# Altium PCB CR-10 Motherboard.PcbDoc (part 3 of 14)
Units mil, origin at the board's own origin, x right, y up, seen from the top; angles counter-clockwise.
Board outline 3970.48 x 2769.68 mil, 2 copper layers (TopLayer, BottomLayer); 147 components, 128 nets, 667 pads, 614 vias.
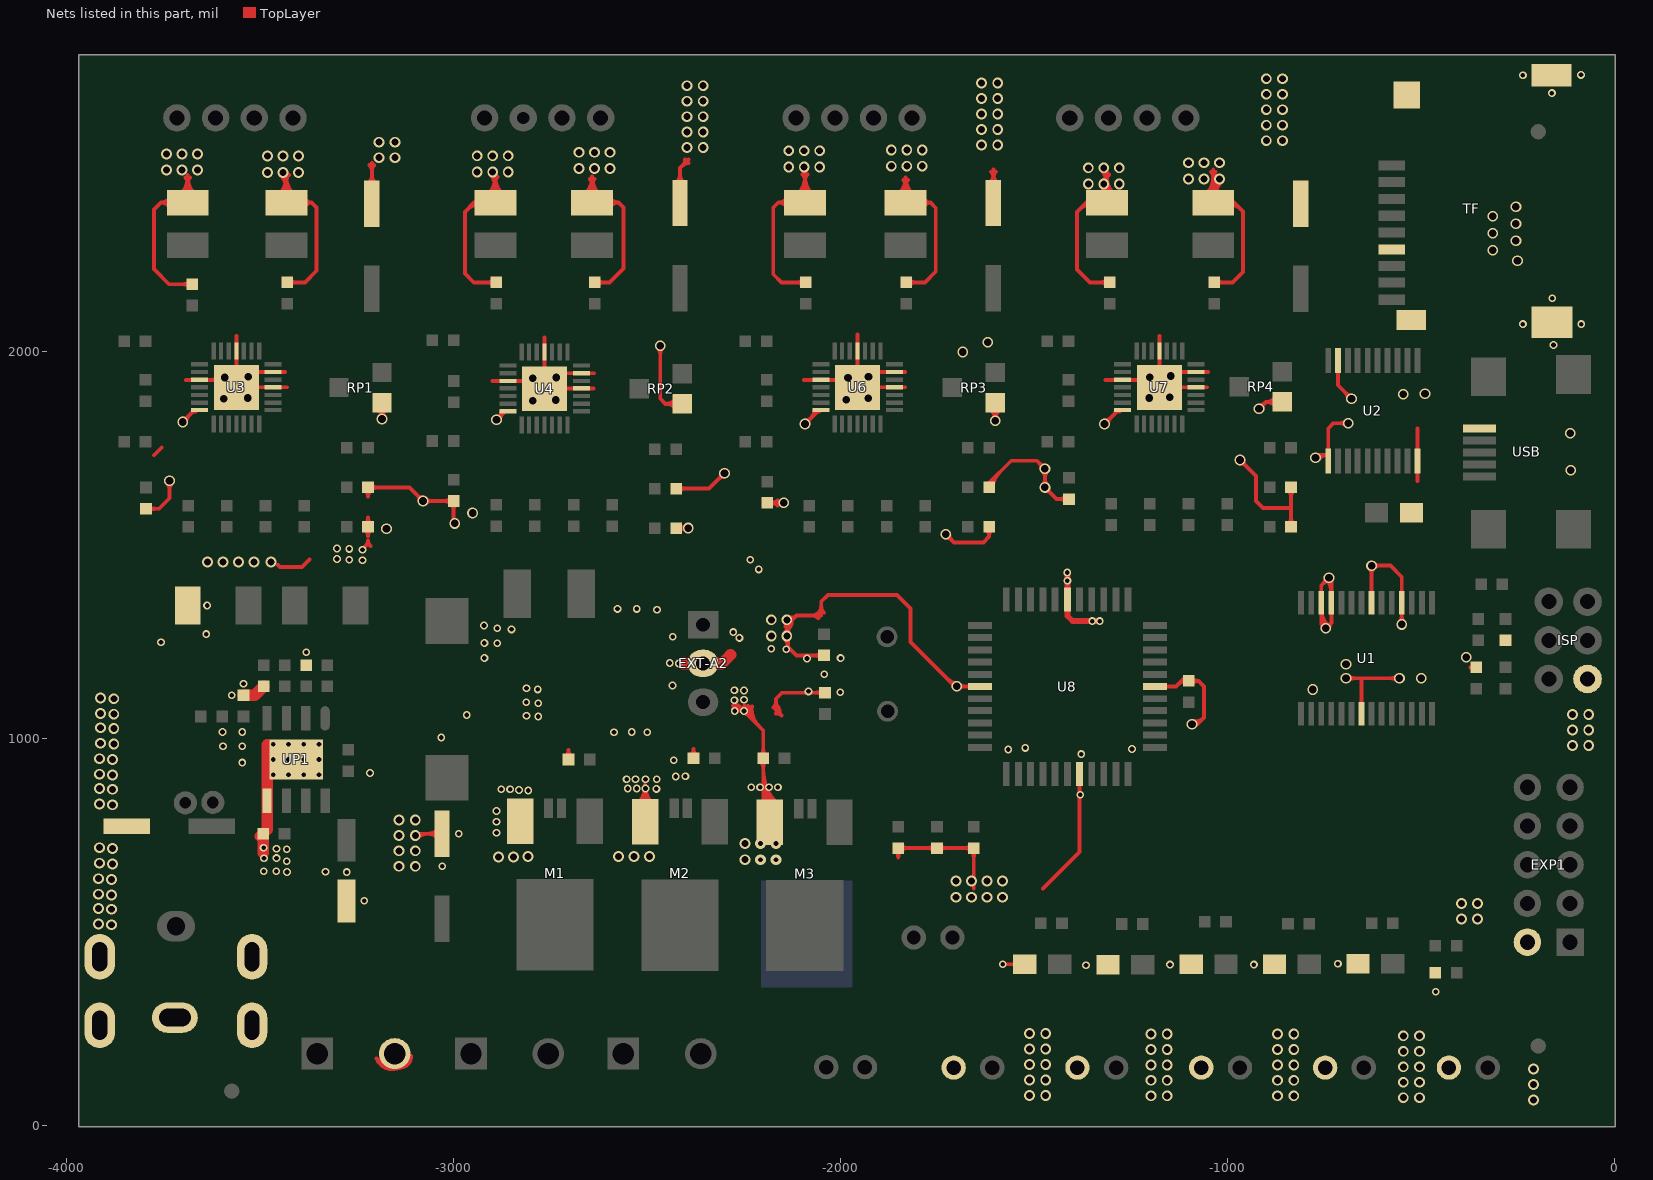
[diagram p3: the nets of this part, all layers, seen from the top]

## Via types
v1: diameter 28, hole 18, TopLayer to BottomLayer, tented both sides, 246 vias
v2: diameter 27.56, hole 19.68, TopLayer to BottomLayer, tented both sides, 196 vias
v3: diameter 20, hole 12, TopLayer to BottomLayer, tented both sides, 124 vias
v4: diameter 27.56, hole 11.81, TopLayer to BottomLayer, tented bottom, 16 vias
v5: diameter 27.56, hole 19.68, TopLayer to BottomLayer, 16 vias
v6: diameter 20, hole 12, TopLayer to BottomLayer, 12 vias
v7: diameter 28, hole 11.81, TopLayer to BottomLayer, tented both sides, 4 vias

## Nets (pads, with @x,y where several pads share a name; then routed paths per layer and width w, separated by ;. In a path a pad name is that pad's centre, name@x,y a point inside that pad or via, vN(x,y) a via of type N, cw(c..) or ccw(c..) an arc to the next point about the centre after c; other vN are vias at no path point) (continued)
GND: (continued)
  TopLayer w10: C34.2@-3794.45,1594.8 -3760.57,1594.8 -3733.54,1621.84 v2(-3733.54,1666.84) ; -3773.85,1732.88 -3753.54,1753.19 ; v2(-3699.54,1818.84) -3672.54,1845.84 -3666.54,1845.84 U3.7@-3666.54,1846.84 ; -3690.57,1927.88 -3618.62,1927.88 -3619.58,1928.84 ; -3686.54,2456.84 S1.2@-3686.54,2385.84 -3755.54,2385.84 ; C11.1@-3674.54,2174.84 -3734.54,2174.84 -3773.54,2213.84 -3773.54,2367.84 -3755.54,2385.84 ; U3.0@-3603.54,1928.84 -3619.58,1928.84 ; U3.0@-3560.62,1946.93 -3560.62,2041.76 ; U3.0@-3524.54,1947.84 U3.0@-3504.38,1947.84 ; U3.0@-3520.47,1908.88 -3430.5,1908.88 ; U3.0@-3502.62,1947.88 -3435.5,1947.88 ; -3453,1449 -3448.39,1444.39 -3391.61,1444.39 -3372,1464 ; v1@-3446.9,2457.48 cw(c-3483.99,2420.39) -3431.54,2420.39 ; v1@-3439.83,2464.55 cw(c-3459.85,2444.53) -3431.54,2444.53 ; v1@-3431.54,2463.84 S2.2@-3431.54,2385.84 -3366.54,2385.84 ; C12.2@-3429.54,2179.84 -3383.54,2179.84 -3353.54,2209.84 -3353.54,2372.84 -3366.54,2385.84 ; C13.2@-3220.62,1649.88 -3113.57,1649.88 v2(-3078.54,1614.84) C36.2@-2999.54,1614.84 -2999.54,1557.84 -2996.54,1554.84 v2(-2996.54,1556.84) ; C1.2@-3210.62,2382.88 -3210.62,2488.76 ; RP1.2@-3184.62,1868.88 v2(-3184.62,1826.76) ; v1@-3099.54,754.84 C28.2@-3029.54,754.84 ; v1@-3092.17,744.48 cw(c-3067.15,719.46) -3067.15,754.84 ; v1@-2904.9,2458.48 cw(c-2937.16,2426.22) -2891.54,2426.22 ; -2899.54,1924.84 U4.0@-2799.54,1924.84 ; v1@-2897.83,2465.55 cw(c-2913.02,2450.36) -2891.54,2450.36 ; v1@-2891.54,2458.84 S3.2@-2891.54,2385.84 -2946.54,2385.84 ; C15.1@-2889.54,2179.84 -2947.54,2179.84 -2970.54,2202.84 -2970.54,2361.84 -2946.54,2385.84 ; v2(-2888.54,1824.84) U4.7@-2869.54,1843.84 ; -2764.54,2036.84 -2764.54,1941.84 U4.0@-2763.54,1940.84 ; U4.0@-2726.54,1905.84 -2637.54,1905.84 ; U4.0@-2721.54,1944.84 U4.0@-2707.94,1944.84 ; -2706.54,1944.84 -2636.54,1944.84 ; C16.2@-2634.54,2179.84 -2596.54,2179.84 -2560.54,2215.84 -2560.54,2372.84 -2573.54,2385.84 ; v2(-2465.54,2015.84) -2465.54,1879.84 -2451.54,1865.84 ; R17.2@-2424.54,1544.84 v2(-2393.54,1544.84) ; C17.2@-2424.54,1646.84 -2339.54,1646.84 v2(-2299.54,1686.84) ; C2.2@-2414.54,2384.84 -2414.54,2474.84 -2392.54,2496.84 ; RP2.2@-2408.54,1865.84 -2451.54,1865.84 ; -2278.04,1085.71 cw(c-2271.04,1073.69) -2261.22,1083.52 ; v3@-2277.54,1075.84 cw(c-2277.54,1017.9) -2236.56,1058.87 ; -2277.54,1085.84 cw(c-2277.54,1052.04) v3@-2253.64,1075.94 ; v3@-2273.01,1077.06 cw(c-2264.29,1062.09) v3@-2252.04,1074.34 ; -2259.54,1081.84 -2199.54,1021.84 -2199.54,801.84 M3.3@-2182.54,784.84 ; -2248.43,1086.34 ccw(c-2220.81,1082.55) -2240.52,1062.83 ; -2238.53,1084.98 ccw(c-2195.75,1079.12) -2226.28,1048.59 ; -2228.62,1083.62 ccw(c-2170.7,1075.68) -2212.04,1034.34 ; C38.2@-2189.54,1609.84 v2@-2156.54,1609.84 ; -2166.54,1074.84 -2166.54,1103.84 -2150.94,1119.44 C51.2@-2039.8,1119.44 ; v1@-2144.9,1272.21 ccw(c-2167.51,1294.81) v1@-2135.54,1294.81 ; v1@-2144.9,1301.48 cw(c-2167.51,1278.87) v1@-2135.54,1278.87 ; v1@-2144.77,1259.35 cw(c-2165.57,1237.68) v3@-2135.54,1237.68 ; v1@-2139.01,1306.96 ccw(c-2132.62,1318.88) -2123.06,1309.32 ; -2135.54,1251.36 cw(c-2124.05,1251.36) v1@-2132.17,1259.48 ; -2135.54,1280.33 ccw(c-2124.05,1280.33) v1@-2132.17,1272.21 ; -2135.54,1293.36 cw(c-2124.05,1293.36) v1@-2132.17,1301.48 ; v1@-2134.28,1315.78 ccw(c-2125.98,1331.28) -2113.54,1318.84 ; v1@-2099.9,2471.48 cw(c-2120.09,2451.29) -2091.54,2451.29 ; -2094.5,1927.88 -2013.62,1927.88 ; v2(-2091.54,1813.84) -2060.54,1844.84 -2060.54,1845.84 -2054.66,1845.84 U6.7@-2052.12,1848.38 ; -2091.54,2460.94 cw(c-2076.64,2460.94) v1@-2087.17,2471.48 ; v1@-2091.54,2464.84 S5.2@-2091.54,2385.84 -2160.54,2385.84 ; C19.1@-2089.54,2179.84 -2152.54,2179.84 -2173.54,2200.84 -2173.54,2372.84 -2160.54,2385.84 ; C50.2@-2042.46,1215.91 -2113.61,1215.91 -2135.54,1237.84 -2135.54,1296.84 -2113.54,1318.84 ; -2013.66,1927.88 -2013.62,1927.84 U6.0@-1999.54,1927.84 ; U6.0@-1955.62,1964.15 -1955.54,1964.07 U6.0@-1955.54,1951.84 ; U6.0@-1955.62,1965.88 -1955.62,2044.93 ; U6.0@-1897.62,1908.88 -1832.57,1908.88 ; U6.0@-1897.62,1947.88 -1833.57,1947.88 ; C43.2@-1850.54,717.84 C42.2@-1655.54,717.84 -1655.54,613.84 ; C20.2@-1829.54,2179.84 -1781.54,2179.84 -1753.54,2207.84 -1753.54,2371.84 -1767.54,2385.84 ; v2(-1727.54,1528.84) -1706.54,1507.84 -1630.54,1507.84 -1615.62,1522.76 R20.2@-1615.62,1547.88 ; U8.6@-1639.54,1135.84 -1703.54,1135.84 -1818.54,1250.84 -1818.54,1336.84 -1853.54,1371.84 -2032.54,1371.84 -2049.54,1354.84 -2049.54,1318.84 -2113.54,1318.84 ; C3.2@-1604.54,2384.84 -1604.54,2471.84 ; RP3.2@-1599.62,1868.88 v2(-1599.62,1821.93) ; v3(-1580.54,417.84) C5.2@-1523.54,417.84 ; -1476.54,613.84 -1382.54,707.84 U8.18@-1382.54,908.84 ; C40.2@-1409.45,1619.8 -1441.5,1619.8 v2(-1471.54,1649.84) v2(-1471.54,1697.84) -1492.54,1718.84 -1558.54,1718.84 -1615.62,1661.76 C21.2@-1615.62,1649.88 ; v1@-1325.9,2427.48 cw(c-1360.58,2392.8) S7.2@-1311.54,2392.8 ; v1@-1325.9,2469.48 cw(c-1360.58,2434.8) v1@-1311.54,2434.8 ; v1@-1324.37,2441.43 ccw(c-1339.3,2464.84) -1311.54,2464.84 S7.2@-1311.54,2385.84 -1364.54,2385.84 -1388.54,2361.84 -1388.54,2212.84 -1355.54,2179.84 C23.1@-1304.54,2179.84 ; v1@-1319,2433 ccw(c-1327.67,2446.61) -1311.54,2446.61 ; v1@-1318.83,2434.55 cw(c-1336.43,2416.94) S7.2@-1311.54,2416.94 ; v1@-1318.83,2476.55 cw(c-1336.43,2458.94) -1311.54,2458.94 ; v2(-1317.54,1813.84) -1285.54,1845.84 U7.7@-1278.54,1845.84 ; -1315.57,1927.88 -1228.49,1927.88 U7.0@-1228.45,1927.84 ; U8.28@-1187.54,1135.84 -1132.54,1135.84 -1109.54,1158.84 C45.2@-1099.54,1158.84 ; -1175.62,2041.93 -1175.62,1949.25 U7.0@-1174.54,1948.16 ; U7.0@-1139.54,1947.84 U7.0@-1119.55,1947.84 ; U7.0@-1136.54,1908.84 -1136.2,1908.84 -1136.16,1908.88 -1052.57,1908.88 ; U7.0@-1117.66,1947.84 -1117.62,1947.88 -1049.5,1947.88 ; C45.2@-1092.46,1142.77 cw(c-1075.39,1125.7) -1075.39,1149.84 cw(c-1075.39,1173.98) C45.2@-1092.46,1156.91 ; v2@-1091.8,1036.65 ccw(c-1087.45,1056.06) -1073.38,1041.99 ; v2(-1091.54,1037.84) -1077.54,1037.84 ; v2@-1089.61,1046.41 ccw(c-1082.74,1077.04) -1060.54,1054.84 ; v2@-1083.63,1034.02 cw(c-1077.54,1031.07) -1077.54,1037.84 ; v2@-1083.63,1041.67 ccw(c-1077.54,1044.61) -1077.54,1037.84 ; S8.2@-1036.54,2386.49 cw(c-960.18,2386.49) v1@-1014.17,2440.48 ; S8.2@-1036.54,2410.63 cw(c-984.32,2410.63) v1@-1021.24,2447.55 ; -1036.54,2434.77 cw(c-1008.46,2434.77) v1@-1028.31,2454.62 ; -1036.54,2471.84 S8.2@-1036.54,2385.84 -982.54,2385.84 -959.54,2362.84 -959.54,2206.84 -986.54,2179.84 C24.2@-1034.54,2179.84 ; S8.2@-1016.25,2387.71 cw(c-1002.67,2352.16) -975.76,2379.07 ; S8.2@-1012.68,2378.37 cw(c-996.64,2336.37) -964.85,2368.16 ; v2(-967.54,1720.84) -926.54,1679.84 -926.54,1614.84 -908.54,1596.84 -835.62,1596.84 ; v2(-918.54,1852.84) -900.54,1870.84 ; RP4.2@-858.54,1870.84 -900.54,1870.84 ; R23.2@-835.62,1547.88 C25.2@-835.62,1649.88 ; v2@-773.49,1727.61 cw(c-760.45,1717.09) -760.45,1733.84 ; v2(-772.54,1726.84) -765.54,1733.84 U2.1@-739.54,1733.84 ; v2@-765.7,1721.33 cw(c-739.54,1700.23) U2.1@-739.54,1733.84 ; -757.54,1311.87 ccw(c-719.51,1311.87) v2@-746.4,1284.98 ; U1.26@-757.54,1336.01 ccw(c-695.37,1336.01) v2@-739.33,1292.05 ; v2@-754.19,1287.32 ccw(c-766.03,1289.35) -757.53,1297.84 ; v2@-747.02,1294.5 cw(c-749.04,1306.33) -757.53,1297.84 ; v2@-746.31,1416.84 cw(c-767.51,1416.84) -752.52,1401.85 cw(c-737.54,1386.87) v2@-737.54,1408.06 ; v2(-745.54,1285.84) -757.54,1297.84 ; v2@-744.34,1294.54 ccw(c-742.27,1309.57) -731.54,1298.84 ; v2@-743.74,1410.63 cw(c-773.22,1381.16) U1.25@-731.54,1381.16 ; v2@-742.51,1294.08 ccw(c-739.9,1301.21) -734.54,1295.84 ; v2@-736.95,1287.68 cw(c-728.23,1289.54) -734.54,1295.84 ; v2@-736.76,1285.97 cw(c-718.93,1286.23) -731.54,1298.84 ; U2.19@-714.54,1977.6 -714.54,1913.84 v2(-679.54,1878.84) ; v2@-693.74,1809.63 ccw(c-708.73,1794.65) -708.73,1815.84 ccw(c-708.73,1837.04) v2@-693.74,1822.05 ; v2(-693.54,1156.84) v2(-555.54,1156.84) ; v2@-688.31,1878.84 ccw(c-709.51,1878.84) -694.52,1893.83 ccw(c-679.54,1908.82) v2@-679.54,1887.62 ; v2(-687.54,1815.84) -725.54,1815.84 -739.54,1801.84 U2.1@-739.54,1733.84 ; U1.7@-653.54,1064.84 -653.54,1156.84 ; v2@-633.74,1441.63 cw(c-648.73,1426.65) -627.54,1426.65 cw(c-606.34,1426.65) -621.33,1441.63 cw(c-606.34,1426.65) -606.34,1447.84 cw(c-606.34,1469.04) v2@-621.33,1454.05 ; U1.21@-627.54,1351.84 v2(-627.54,1447.84) -578.54,1447.84 -549.54,1418.84 v2(-549.54,1295.84) ; v2@-555.74,1302.05 ccw(c-570.73,1317.04) -549.54,1317.04 ccw(c-528.34,1317.04) v2@-543.33,1302.05 ; -508.54,1665.84 -508.54,1801.84 ; 1K.2@-371.54,1184.84 1K.2@-356.54,1184.84 ; C34.2@-3787.38,1587.73 cw(c-3770.31,1570.66) -3770.31,1594.8 ; C34.2@-3787.38,1587.73 cw(c-3770.31,1570.66) -3770.31,1594.8 ; C34.2@-3787.38,1587.73 cw(c-3770.31,1570.66) -3770.31,1594.8 ; C34.2@-3787.38,1587.73 cw(c-3770.31,1570.66) -3770.31,1594.8 ; C34.2@-3787.38,1587.73 cw(c-3770.31,1570.66) -3770.31,1594.8 ; C34.2@-3787.38,1587.73 cw(c-3770.31,1570.66) -3770.31,1594.8 ; C34.2@-3787.38,1587.73 cw(c-3770.31,1570.66) -3770.31,1594.8 ; C34.2@-3787.38,1587.73 cw(c-3770.31,1570.66) -3770.31,1594.8 ; C34.2@-3787.38,1587.73 cw(c-3770.31,1570.66) -3770.31,1594.8 ; C34.2@-3787.38,1601.87 ccw(c-3770.31,1618.95) -3770.31,1594.8 ; C34.2@-3787.38,1601.87 ccw(c-3770.31,1618.95) -3770.31,1594.8 ; C34.2@-3787.38,1601.87 ccw(c-3770.31,1618.95) -3770.31,1594.8 ; C34.2@-3787.38,1601.87 ccw(c-3770.31,1618.95) -3770.31,1594.8 ; C34.2@-3787.38,1601.87 ccw(c-3770.31,1618.95) -3770.31,1594.8 ; C34.2@-3787.38,1601.87 ccw(c-3770.31,1618.95) -3770.31,1594.8 ; C34.2@-3787.38,1601.87 ccw(c-3770.31,1618.95) -3770.31,1594.8 ; C34.2@-3787.38,1601.87 ccw(c-3770.31,1618.95) -3770.31,1594.8 ; C34.2@-3787.38,1601.87 ccw(c-3770.31,1618.95) -3770.31,1594.8 ; -3755.53,2385.84 cw(c-3755.53,2358.7) S1.2@-3731.91,2372.06 ; -3755.53,2385.84 ccw(c-3755.53,2412.98) S1.2@-3731.91,2399.62 ; -3755.53,2385.84 cw(c-3755.53,2358.7) S1.2@-3731.91,2372.06 ; -3755.53,2385.84 ccw(c-3755.53,2412.98) S1.2@-3731.91,2399.62 ; -3755.53,2385.84 cw(c-3755.53,2358.7) S1.2@-3731.91,2372.06 ; -3755.53,2385.84 ccw(c-3755.53,2412.98) S1.2@-3731.91,2399.62 ; -3755.53,2385.84 cw(c-3755.53,2358.7) S1.2@-3731.91,2372.06 ; -3755.53,2385.84 ccw(c-3755.53,2412.98) S1.2@-3731.91,2399.62 ; -3755.53,2385.84 cw(c-3755.53,2358.7) S1.2@-3731.91,2372.06 ; -3755.53,2385.84 ccw(c-3755.53,2412.98) S1.2@-3731.91,2399.62 ; -3755.53,2385.84 ccw(c-3755.53,2412.98) S1.2@-3731.91,2399.62 ; -3755.53,2385.84 cw(c-3755.53,2358.7) S1.2@-3731.91,2372.06 ; -3755.53,2385.84 ccw(c-3755.53,2412.98) S1.2@-3731.91,2399.62 ; -3755.53,2385.84 cw(c-3755.53,2358.7) S1.2@-3731.91,2372.06 ; -3755.53,2385.84 ccw(c-3755.53,2412.98) S1.2@-3731.91,2399.62 ; -3755.53,2385.84 cw(c-3755.53,2358.7) S1.2@-3731.91,2372.06 ; -3755.53,2385.84 ccw(c-3755.53,2412.98) S1.2@-3731.91,2399.62 ; -3755.53,2385.84 cw(c-3755.53,2358.7) S1.2@-3731.91,2372.06 ; v2@-3739.74,1660.63 cw(c-3754.73,1645.65) -3733.54,1645.65 ; v2@-3739.74,1660.63 cw(c-3754.73,1645.65) -3733.54,1645.65 ; v2@-3739.74,1660.63 cw(c-3754.73,1645.65) -3733.54,1645.65 ; v2@-3739.74,1660.63 cw(c-3754.73,1645.65) -3733.54,1645.65 ; v2@-3739.74,1660.63 cw(c-3754.73,1645.65) -3733.54,1645.65 ; v2@-3739.74,1660.63 cw(c-3754.73,1645.65) -3733.54,1645.65 ; v2@-3739.74,1660.63 cw(c-3754.73,1645.65) -3733.54,1645.65 ; v2@-3739.74,1660.63 cw(c-3754.73,1645.65) -3733.54,1645.65 ; v2@-3739.74,1660.63 cw(c-3754.73,1645.65) -3733.54,1645.65 ; -3733.54,1645.65 cw(c-3712.34,1645.65) v2@-3727.33,1660.63 ; -3733.54,1645.65 cw(c-3712.34,1645.65) v2@-3727.33,1660.63 ; -3733.54,1645.65 cw(c-3712.34,1645.65) v2@-3727.33,1660.63 ; -3733.54,1645.65 cw(c-3712.34,1645.65) v2@-3727.33,1660.63 ; -3733.54,1645.65 cw(c-3712.34,1645.65) v2@-3727.33,1660.63 ; -3733.54,1645.65 cw(c-3712.34,1645.65) v2@-3727.33,1660.63 ; -3733.54,1645.65 cw(c-3712.34,1645.65) v2@-3727.33,1660.63 ; -3733.54,1645.65 cw(c-3712.34,1645.65) v2@-3727.33,1660.63 ; -3733.54,1645.65 cw(c-3712.34,1645.65) v2@-3727.33,1660.63 ; S1.2@-3706.33,2405.64 ccw(c-3754.13,2453.44) -3686.54,2453.44 ; S1.2@-3706.33,2405.64 ccw(c-3754.13,2453.44) -3686.54,2453.44 ; S1.2@-3706.33,2405.64 ccw(c-3754.13,2453.44) -3686.54,2453.44 ; S1.2@-3706.33,2405.64 ccw(c-3754.13,2453.44) -3686.54,2453.44 ; S1.2@-3706.33,2405.64 ccw(c-3754.13,2453.44) -3686.54,2453.44 ; S1.2@-3706.33,2405.64 ccw(c-3754.13,2453.44) -3686.54,2453.44 ; S1.2@-3706.33,2405.64 ccw(c-3754.13,2453.44) -3686.54,2453.44 ; S1.2@-3706.33,2405.64 ccw(c-3754.13,2453.44) -3686.54,2453.44 ; S1.2@-3706.33,2405.64 ccw(c-3754.13,2453.44) -3686.54,2453.44 ; v2@-3699.54,1827.62 ccw(c-3699.54,1848.82) -3684.55,1833.83 ; v2@-3699.54,1827.62 ccw(c-3699.54,1848.82) -3684.55,1833.83 ; v2@-3699.54,1827.62 ccw(c-3699.54,1848.82) -3684.55,1833.83 ; v2@-3699.54,1827.62 ccw(c-3699.54,1848.82) -3684.55,1833.83 ; v2@-3699.54,1827.62 ccw(c-3699.54,1848.82) -3684.55,1833.83 ; v2@-3699.54,1827.62 ccw(c-3699.54,1848.82) -3684.55,1833.83 ; v2@-3699.54,1827.62 ccw(c-3699.54,1848.82) -3684.55,1833.83 ; v2@-3699.54,1827.62 ccw(c-3699.54,1848.82) -3684.55,1833.83 ; v2@-3699.54,1827.62 ccw(c-3699.54,1848.82) -3684.55,1833.83 ; S1.2@-3699.26,2398.57 ccw(c-3729.99,2429.3) -3686.54,2429.3 ; S1.2@-3699.26,2398.57 ccw(c-3729.99,2429.3) -3686.54,2429.3 ; S1.2@-3699.26,2398.57 ccw(c-3729.99,2429.3) -3686.54,2429.3 ; S1.2@-3699.26,2398.57 ccw(c-3729.99,2429.3) -3686.54,2429.3 ; S1.2@-3699.26,2398.57 ccw(c-3729.99,2429.3) -3686.54,2429.3 ; S1.2@-3699.26,2398.57 ccw(c-3729.99,2429.3) -3686.54,2429.3 ; S1.2@-3699.26,2398.57 ccw(c-3729.99,2429.3) -3686.54,2429.3 ; S1.2@-3699.26,2398.57 ccw(c-3729.99,2429.3) -3686.54,2429.3 ; S1.2@-3699.26,2398.57 ccw(c-3729.99,2429.3) -3686.54,2429.3 ; -3698.68,2174.84 cw(c-3698.68,2150.7) C11.1@-3681.61,2167.77 ; -3698.68,2174.84 ccw(c-3698.68,2198.98) C11.1@-3681.61,2181.91 ; -3698.68,2174.84 cw(c-3698.68,2150.7) C11.1@-3681.61,2167.77 ; -3698.68,2174.84 ccw(c-3698.68,2198.98) C11.1@-3681.61,2181.91 ; -3698.68,2174.84 cw(c-3698.68,2150.7) C11.1@-3681.61,2167.77 ; -3698.68,2174.84 ccw(c-3698.68,2198.98) C11.1@-3681.61,2181.91 ; -3698.68,2174.84 cw(c-3698.68,2150.7) C11.1@-3681.61,2167.77 ; -3698.68,2174.84 ccw(c-3698.68,2198.98) C11.1@-3681.61,2181.91 ; -3698.68,2174.84 cw(c-3698.68,2150.7) C11.1@-3681.61,2167.77 ; -3698.68,2174.84 ccw(c-3698.68,2198.98) C11.1@-3681.61,2181.91 ; -3698.68,2174.84 ccw(c-3698.68,2198.98) C11.1@-3681.61,2181.91 ; -3698.68,2174.84 cw(c-3698.68,2150.7) C11.1@-3681.61,2167.77 ; -3698.68,2174.84 ccw(c-3698.68,2198.98) C11.1@-3681.61,2181.91 ; -3698.68,2174.84 cw(c-3698.68,2150.7) C11.1@-3681.61,2167.77 ; -3698.68,2174.84 ccw(c-3698.68,2198.98) C11.1@-3681.61,2181.91 ; -3698.68,2174.84 cw(c-3698.68,2150.7) C11.1@-3681.61,2167.77 ; -3698.68,2174.84 ccw(c-3698.68,2198.98) C11.1@-3681.61,2181.91 ; -3698.68,2174.84 cw(c-3698.68,2150.7) C11.1@-3681.61,2167.77 ; -3692.74,2450.63 cw(c-3707.73,2435.65) -3686.54,2435.65 ; -3692.74,2450.63 cw(c-3707.73,2435.65) -3686.54,2435.65 ; -3692.74,2450.63 cw(c-3707.73,2435.65) -3686.54,2435.65 ; -3692.74,2450.63 cw(c-3707.73,2435.65) -3686.54,2435.65 ; -3692.74,2450.63 cw(c-3707.73,2435.65) -3686.54,2435.65 ; -3692.74,2450.63 cw(c-3707.73,2435.65) -3686.54,2435.65 ; -3692.74,2450.63 cw(c-3707.73,2435.65) -3686.54,2435.65 ; -3692.74,2450.63 cw(c-3707.73,2435.65) -3686.54,2435.65 ; v2@-3690.76,1818.84 cw(c-3669.56,1818.84) -3684.55,1833.83 ; v2@-3690.76,1818.84 cw(c-3669.56,1818.84) -3684.55,1833.83 ; v2@-3690.76,1818.84 cw(c-3669.56,1818.84) -3684.55,1833.83 ; v2@-3690.76,1818.84 cw(c-3669.56,1818.84) -3684.55,1833.83 ; v2@-3690.76,1818.84 cw(c-3669.56,1818.84) -3684.55,1833.83 ; v2@-3690.76,1818.84 cw(c-3669.56,1818.84) -3684.55,1833.83 ; v2@-3690.76,1818.84 cw(c-3669.56,1818.84) -3684.55,1833.83 ; v2@-3690.76,1818.84 cw(c-3669.56,1818.84) -3684.55,1833.83 ; v2@-3690.76,1818.84 cw(c-3669.56,1818.84) -3684.55,1833.83 ; -3686.54,2429.3 ccw(c-3643.08,2429.3) S1.2@-3673.81,2398.57 ; -3686.54,2429.3 ccw(c-3643.08,2429.3) S1.2@-3673.81,2398.57 ; -3686.54,2429.3 ccw(c-3643.08,2429.3) S1.2@-3673.81,2398.57 ; -3686.54,2429.3 ccw(c-3643.08,2429.3) S1.2@-3673.81,2398.57 ; -3686.54,2429.3 ccw(c-3643.08,2429.3) S1.2@-3673.81,2398.57 ; -3686.54,2429.3 ccw(c-3643.08,2429.3) S1.2@-3673.81,2398.57 ; -3686.54,2429.3 ccw(c-3643.08,2429.3) S1.2@-3673.81,2398.57 ; -3686.54,2429.3 ccw(c-3643.08,2429.3) S1.2@-3673.81,2398.57 ; -3686.54,2429.3 ccw(c-3643.08,2429.3) S1.2@-3673.81,2398.57 ; -3686.54,2435.65 cw(c-3665.34,2435.65) -3680.33,2450.63 ; -3686.54,2435.65 cw(c-3665.34,2435.65) -3680.33,2450.63 ; -3686.54,2435.65 cw(c-3665.34,2435.65) -3680.33,2450.63 ; -3686.54,2435.65 cw(c-3665.34,2435.65) -3680.33,2450.63 ; -3686.54,2435.65 cw(c-3665.34,2435.65) -3680.33,2450.63 ; -3686.54,2435.65 cw(c-3665.34,2435.65) -3680.33,2450.63 ; -3686.54,2435.65 cw(c-3665.34,2435.65) -3680.33,2450.63 ; -3686.54,2435.65 cw(c-3665.34,2435.65) -3680.33,2450.63 ; -3686.54,2453.44 ccw(c-3618.94,2453.44) S1.2@-3666.74,2405.64 ; -3686.54,2453.44 ccw(c-3618.94,2453.44) S1.2@-3666.74,2405.64 ; -3686.54,2453.44 ccw(c-3618.94,2453.44) S1.2@-3666.74,2405.64 ; -3686.54,2453.44 ccw(c-3618.94,2453.44) S1.2@-3666.74,2405.64 ; -3686.54,2453.44 ccw(c-3618.94,2453.44) S1.2@-3666.74,2405.64 ; -3686.54,2453.44 ccw(c-3618.94,2453.44) S1.2@-3666.74,2405.64 ; -3686.54,2453.44 ccw(c-3618.94,2453.44) S1.2@-3666.74,2405.64 ; -3686.54,2453.44 ccw(c-3618.94,2453.44) S1.2@-3666.74,2405.64 ; -3686.54,2453.44 ccw(c-3618.94,2453.44) S1.2@-3666.74,2405.64 ; -3675.54,1842.84 ccw(c-3682.58,1849.88) U3.7@-3672.62,1849.88 ; -3675.54,1842.84 ccw(c-3682.58,1849.88) U3.7@-3672.62,1849.88 ; -3675.54,1842.84 ccw(c-3682.58,1849.88) U3.7@-3672.62,1849.88 ; -3675.54,1842.84 ccw(c-3682.58,1849.88) U3.7@-3672.62,1849.88 ; -3619.58,1928.84 ccw(c-3619.58,1957.57) U3.0@-3597.33,1939.4 ; -3619.58,1928.84 ccw(c-3619.58,1957.57) U3.0@-3597.33,1939.4 ; -3619.58,1928.84 ccw(c-3619.58,1957.57) U3.0@-3597.33,1939.4 ; -3619.58,1928.84 ccw(c-3619.58,1957.57) U3.0@-3597.33,1939.4 ; -3619.58,1928.84 ccw(c-3619.58,1957.57) U3.0@-3597.33,1939.4 ; S2.2@-3451.33,2405.64 ccw(c-3499.13,2453.44) v1@-3431.54,2453.44 ; S2.2@-3451.33,2405.64 ccw(c-3499.13,2453.44) v1@-3431.54,2453.44 ; S2.2@-3451.33,2405.64 ccw(c-3499.13,2453.44) v1@-3431.54,2453.44 ; S2.2@-3451.33,2405.64 ccw(c-3499.13,2453.44) v1@-3431.54,2453.44 ; S2.2@-3451.33,2405.64 ccw(c-3499.13,2453.44) v1@-3431.54,2453.44 ; S2.2@-3451.33,2405.64 ccw(c-3499.13,2453.44) v1@-3431.54,2453.44 ; S2.2@-3451.33,2405.64 ccw(c-3499.13,2453.44) v1@-3431.54,2453.44 ; S2.2@-3451.33,2405.64 ccw(c-3499.13,2453.44) v1@-3431.54,2453.44 ; S2.2@-3451.33,2405.64 ccw(c-3499.13,2453.44) v1@-3431.54,2453.44 ; S2.2@-3444.26,2398.57 ccw(c-3474.99,2429.3) -3431.54,2429.3 ; S2.2@-3444.26,2398.57 ccw(c-3474.99,2429.3) -3431.54,2429.3 ; S2.2@-3444.26,2398.57 ccw(c-3474.99,2429.3) -3431.54,2429.3 ; S2.2@-3444.26,2398.57 ccw(c-3474.99,2429.3) -3431.54,2429.3 ; S2.2@-3444.26,2398.57 ccw(c-3474.99,2429.3) -3431.54,2429.3 ; S2.2@-3444.26,2398.57 ccw(c-3474.99,2429.3) -3431.54,2429.3 ; S2.2@-3444.26,2398.57 ccw(c-3474.99,2429.3) -3431.54,2429.3 ; S2.2@-3444.26,2398.57 ccw(c-3474.99,2429.3) -3431.54,2429.3 ; S2.2@-3444.26,2398.57 ccw(c-3474.99,2429.3) -3431.54,2429.3 ; v1@-3437.74,2457.63 cw(c-3452.73,2442.65) -3431.54,2442.65 ; v1@-3437.74,2457.63 cw(c-3452.73,2442.65) -3431.54,2442.65 ; v1@-3437.74,2457.63 cw(c-3452.73,2442.65) -3431.54,2442.65 ; v1@-3437.74,2457.63 cw(c-3452.73,2442.65) -3431.54,2442.65 ; v1@-3437.74,2457.63 cw(c-3452.73,2442.65) -3431.54,2442.65 ; v1@-3437.74,2457.63 cw(c-3452.73,2442.65) -3431.54,2442.65 ; v1@-3437.74,2457.63 cw(c-3452.73,2442.65) -3431.54,2442.65 ; v1@-3437.74,2457.63 cw(c-3452.73,2442.65) -3431.54,2442.65 ; -3431.54,2429.3 ccw(c-3388.08,2429.3) S2.2@-3418.81,2398.57 ; -3431.54,2429.3 ccw(c-3388.08,2429.3) S2.2@-3418.81,2398.57 ; -3431.54,2429.3 ccw(c-3388.08,2429.3) S2.2@-3418.81,2398.57 ; -3431.54,2429.3 ccw(c-3388.08,2429.3) S2.2@-3418.81,2398.57 ; -3431.54,2429.3 ccw(c-3388.08,2429.3) S2.2@-3418.81,2398.57 ; -3431.54,2429.3 ccw(c-3388.08,2429.3) S2.2@-3418.81,2398.57 ; -3431.54,2429.3 ccw(c-3388.08,2429.3) S2.2@-3418.81,2398.57 ; -3431.54,2429.3 ccw(c-3388.08,2429.3) S2.2@-3418.81,2398.57 ; -3431.54,2429.3 ccw(c-3388.08,2429.3) S2.2@-3418.81,2398.57 ; -3431.54,2442.65 cw(c-3410.34,2442.65) -3425.33,2457.63 ; -3431.54,2442.65 cw(c-3410.34,2442.65) -3425.33,2457.63 ; -3431.54,2442.65 cw(c-3410.34,2442.65) -3425.33,2457.63 ; -3431.54,2442.65 cw(c-3410.34,2442.65) -3425.33,2457.63 ; -3431.54,2442.65 cw(c-3410.34,2442.65) -3425.33,2457.63 ; -3431.54,2442.65 cw(c-3410.34,2442.65) -3425.33,2457.63 ; -3431.54,2442.65 cw(c-3410.34,2442.65) -3425.33,2457.63 ; -3431.54,2442.65 cw(c-3410.34,2442.65) -3425.33,2457.63 ; v1@-3431.54,2453.44 ccw(c-3363.94,2453.44) S2.2@-3411.74,2405.64 ; v1@-3431.54,2453.44 ccw(c-3363.94,2453.44) S2.2@-3411.74,2405.64 ; v1@-3431.54,2453.44 ccw(c-3363.94,2453.44) S2.2@-3411.74,2405.64 ; v1@-3431.54,2453.44 ccw(c-3363.94,2453.44) S2.2@-3411.74,2405.64 ; v1@-3431.54,2453.44 ccw(c-3363.94,2453.44) S2.2@-3411.74,2405.64 ; v1@-3431.54,2453.44 ccw(c-3363.94,2453.44) S2.2@-3411.74,2405.64 ; v1@-3431.54,2453.44 ccw(c-3363.94,2453.44) S2.2@-3411.74,2405.64 ; v1@-3431.54,2453.44 ccw(c-3363.94,2453.44) S2.2@-3411.74,2405.64 ; v1@-3431.54,2453.44 ccw(c-3363.94,2453.44) S2.2@-3411.74,2405.64 ; C12.2@-3422.46,2172.77 cw(c-3405.39,2155.7) -3405.39,2179.84 ; C12.2@-3422.46,2172.77 cw(c-3405.39,2155.7) -3405.39,2179.84 ; C12.2@-3422.46,2172.77 cw(c-3405.39,2155.7) -3405.39,2179.84 ; C12.2@-3422.46,2172.77 cw(c-3405.39,2155.7) -3405.39,2179.84 ; C12.2@-3422.46,2172.77 cw(c-3405.39,2155.7) -3405.39,2179.84 ; C12.2@-3422.46,2172.77 cw(c-3405.39,2155.7) -3405.39,2179.84 ; C12.2@-3422.46,2172.77 cw(c-3405.39,2155.7) -3405.39,2179.84 ; C12.2@-3422.46,2172.77 cw(c-3405.39,2155.7) -3405.39,2179.84 ; C12.2@-3422.46,2172.77 cw(c-3405.39,2155.7) -3405.39,2179.84 ; C12.2@-3422.46,2186.91 ccw(c-3405.39,2203.98) -3405.39,2179.84 ; C12.2@-3422.46,2186.91 ccw(c-3405.39,2203.98) -3405.39,2179.84 ; C12.2@-3422.46,2186.91 ccw(c-3405.39,2203.98) -3405.39,2179.84 ; C12.2@-3422.46,2186.91 ccw(c-3405.39,2203.98) -3405.39,2179.84 ; C12.2@-3422.46,2186.91 ccw(c-3405.39,2203.98) -3405.39,2179.84 ; C12.2@-3422.46,2186.91 ccw(c-3405.39,2203.98) -3405.39,2179.84 ; C12.2@-3422.46,2186.91 ccw(c-3405.39,2203.98) -3405.39,2179.84 ; C12.2@-3422.46,2186.91 ccw(c-3405.39,2203.98) -3405.39,2179.84 ; C12.2@-3422.46,2186.91 ccw(c-3405.39,2203.98) -3405.39,2179.84 ; S2.2@-3385.17,2373.98 cw(c-3366.54,2365.27) -3366.54,2385.84 ; S2.2@-3385.17,2373.98 cw(c-3366.54,2365.27) -3366.54,2385.84 ; S2.2@-3385.17,2373.98 cw(c-3366.54,2365.27) -3366.54,2385.84 ; S2.2@-3385.17,2373.98 cw(c-3366.54,2365.27) -3366.54,2385.84 ; S2.2@-3385.17,2373.98 cw(c-3366.54,2365.27) -3366.54,2385.84 ; S2.2@-3385.17,2373.98 cw(c-3366.54,2365.27) -3366.54,2385.84 ; S2.2@-3385.17,2373.98 cw(c-3366.54,2365.27) -3366.54,2385.84 ; S2.2@-3385.17,2373.98 cw(c-3366.54,2365.27) -3366.54,2385.84 ; S2.2@-3385.17,2373.98 cw(c-3366.54,2365.27) -3366.54,2385.84 ; S2.2@-3385.17,2397.7 ccw(c-3366.54,2406.41) -3366.54,2385.84 ; S2.2@-3385.17,2397.7 ccw(c-3366.54,2406.41) -3366.54,2385.84 ; S2.2@-3385.17,2397.7 ccw(c-3366.54,2406.41) -3366.54,2385.84 ; S2.2@-3385.17,2397.7 ccw(c-3366.54,2406.41) -3366.54,2385.84 ; S2.2@-3385.17,2397.7 ccw(c-3366.54,2406.41) -3366.54,2385.84 ; S2.2@-3385.17,2397.7 ccw(c-3366.54,2406.41) -3366.54,2385.84 ; S2.2@-3385.17,2397.7 ccw(c-3366.54,2406.41) -3366.54,2385.84 ; S2.2@-3385.17,2397.7 ccw(c-3366.54,2406.41) -3366.54,2385.84 ; S2.2@-3385.17,2397.7 ccw(c-3366.54,2406.41) -3366.54,2385.84 ; R14.2@-3227.69,1540.81 cw(c-3244.76,1523.74) -3220.62,1523.74 ; R14.2@-3227.69,1540.81 cw(c-3244.76,1523.74) -3220.62,1523.74 ; R14.2@-3227.69,1540.81 cw(c-3244.76,1523.74) -3220.62,1523.74 ; R14.2@-3227.69,1540.81 cw(c-3244.76,1523.74) -3220.62,1523.74 ; R14.2@-3227.69,1540.81 cw(c-3244.76,1523.74) -3220.62,1523.74 ; R14.2@-3227.69,1540.81 cw(c-3244.76,1523.74) -3220.62,1523.74 ; R14.2@-3227.69,1540.81 cw(c-3244.76,1523.74) -3220.62,1523.74 ; R14.2@-3227.69,1540.81 cw(c-3244.76,1523.74) -3220.62,1523.74 ; R14.2@-3227.69,1540.81 cw(c-3244.76,1523.74) -3220.62,1523.74 ; R14.2@-3227.69,1554.95 ccw(c-3244.76,1572.02) -3220.62,1572.02 ; R14.2@-3227.69,1554.95 ccw(c-3244.76,1572.02) -3220.62,1572.02 ; R14.2@-3227.69,1554.95 ccw(c-3244.76,1572.02) -3220.62,1572.02 ; R14.2@-3227.69,1554.95 ccw(c-3244.76,1572.02) -3220.62,1572.02 ; R14.2@-3227.69,1554.95 ccw(c-3244.76,1572.02) -3220.62,1572.02 ; R14.2@-3227.69,1554.95 ccw(c-3244.76,1572.02) -3220.62,1572.02 ; R14.2@-3227.69,1554.95 ccw(c-3244.76,1572.02) -3220.62,1572.02 ; R14.2@-3227.69,1554.95 ccw(c-3244.76,1572.02) -3220.62,1572.02 ; R14.2@-3227.69,1554.95 ccw(c-3244.76,1572.02) -3220.62,1572.02 ; C13.2@-3227.69,1642.81 cw(c-3244.76,1625.74) -3220.62,1625.74 ; C13.2@-3227.69,1642.81 cw(c-3244.76,1625.74) -3220.62,1625.74 ; C13.2@-3227.69,1642.81 cw(c-3244.76,1625.74) -3220.62,1625.74 ; C13.2@-3227.69,1642.81 cw(c-3244.76,1625.74) -3220.62,1625.74 ; C13.2@-3227.69,1642.81 cw(c-3244.76,1625.74) -3220.62,1625.74 ; C13.2@-3227.69,1642.81 cw(c-3244.76,1625.74) -3220.62,1625.74 ; C13.2@-3227.69,1642.81 cw(c-3244.76,1625.74) -3220.62,1625.74 ; C13.2@-3227.69,1642.81 cw(c-3244.76,1625.74) -3220.62,1625.74 ; C13.2@-3227.69,1642.81 cw(c-3244.76,1625.74) -3220.62,1625.74 ; -3226.83,1498.14 ccw(c-3241.82,1513.13) -3220.62,1513.13 ; -3226.83,1498.14 ccw(c-3241.82,1513.13) -3220.62,1513.13 ; -3226.83,1498.14 ccw(c-3241.82,1513.13) -3220.62,1513.13 ; -3226.83,1498.14 ccw(c-3241.82,1513.13) -3220.62,1513.13 ; -3226.83,1498.14 ccw(c-3241.82,1513.13) -3220.62,1513.13 ; -3226.83,1498.14 ccw(c-3241.82,1513.13) -3220.62,1513.13 ; -3226.83,1498.14 ccw(c-3241.82,1513.13) -3220.62,1513.13 ; C1.2@-3221.23,2433.49 ccw(c-3246.84,2459.09) -3210.62,2459.09 ; C1.2@-3221.23,2433.49 ccw(c-3246.84,2459.09) -3210.62,2459.09 ; C1.2@-3221.23,2433.49 ccw(c-3246.84,2459.09) -3210.62,2459.09 ; C1.2@-3221.23,2433.49 ccw(c-3246.84,2459.09) -3210.62,2459.09 ; C1.2@-3221.23,2433.49 ccw(c-3246.84,2459.09) -3210.62,2459.09 ; C1.2@-3221.23,2433.49 ccw(c-3246.84,2459.09) -3210.62,2459.09 ; C1.2@-3221.23,2433.49 ccw(c-3246.84,2459.09) -3210.62,2459.09 ; C1.2@-3221.23,2433.49 ccw(c-3246.84,2459.09) -3210.62,2459.09 ; C1.2@-3221.23,2433.49 ccw(c-3246.84,2459.09) -3210.62,2459.09 ; -3220.62,1513.13 ccw(c-3199.43,1513.13) -3214.41,1498.14 ; -3220.62,1513.13 ccw(c-3199.43,1513.13) -3214.41,1498.14 ; -3220.62,1513.13 ccw(c-3199.43,1513.13) -3214.41,1498.14 ; -3220.62,1513.13 ccw(c-3199.43,1513.13) -3214.41,1498.14 ; -3220.62,1513.13 ccw(c-3199.43,1513.13) -3214.41,1498.14 ; -3220.62,1513.13 ccw(c-3199.43,1513.13) -3214.41,1498.14 ; -3220.62,1523.74 cw(c-3196.48,1523.74) R14.2@-3213.55,1540.81 ; -3220.62,1523.74 cw(c-3196.48,1523.74) R14.2@-3213.55,1540.81 ; -3220.62,1523.74 cw(c-3196.48,1523.74) R14.2@-3213.55,1540.81 ; -3220.62,1523.74 cw(c-3196.48,1523.74) R14.2@-3213.55,1540.81 ; -3220.62,1523.74 cw(c-3196.48,1523.74) R14.2@-3213.55,1540.81 ; -3220.62,1523.74 cw(c-3196.48,1523.74) R14.2@-3213.55,1540.81 ; -3220.62,1523.74 cw(c-3196.48,1523.74) R14.2@-3213.55,1540.81 ; -3220.62,1523.74 cw(c-3196.48,1523.74) R14.2@-3213.55,1540.81 ; -3220.62,1523.74 cw(c-3196.48,1523.74) R14.2@-3213.55,1540.81 ; -3220.62,1572.02 ccw(c-3196.48,1572.02) R14.2@-3213.55,1554.95 ; -3220.62,1572.02 ccw(c-3196.48,1572.02) R14.2@-3213.55,1554.95 ; -3220.62,1572.02 ccw(c-3196.48,1572.02) R14.2@-3213.55,1554.95 ; -3220.62,1572.02 ccw(c-3196.48,1572.02) R14.2@-3213.55,1554.95 ; -3220.62,1572.02 ccw(c-3196.48,1572.02) R14.2@-3213.55,1554.95 ; -3220.62,1572.02 ccw(c-3196.48,1572.02) R14.2@-3213.55,1554.95 ; -3220.62,1572.02 ccw(c-3196.48,1572.02) R14.2@-3213.55,1554.95 ; -3220.62,1572.02 ccw(c-3196.48,1572.02) R14.2@-3213.55,1554.95 ; -3220.62,1572.02 ccw(c-3196.48,1572.02) R14.2@-3213.55,1554.95 ; -3220.62,1625.74 cw(c-3196.48,1625.74) C13.2@-3213.55,1642.81 ; -3220.62,1625.74 cw(c-3196.48,1625.74) C13.2@-3213.55,1642.81 ; -3220.62,1625.74 cw(c-3196.48,1625.74) C13.2@-3213.55,1642.81 ; -3220.62,1625.74 cw(c-3196.48,1625.74) C13.2@-3213.55,1642.81 ; -3220.62,1625.74 cw(c-3196.48,1625.74) C13.2@-3213.55,1642.81 ; -3220.62,1625.74 cw(c-3196.48,1625.74) C13.2@-3213.55,1642.81 ; -3220.62,1625.74 cw(c-3196.48,1625.74) C13.2@-3213.55,1642.81 ; -3220.62,1625.74 cw(c-3196.48,1625.74) C13.2@-3213.55,1642.81 ; -3220.62,1625.74 cw(c-3196.48,1625.74) C13.2@-3213.55,1642.81 ; -3216.83,2482.55 cw(c-3231.82,2467.56) -3210.62,2467.56 ; -3216.83,2482.55 cw(c-3231.82,2467.56) -3210.62,2467.56 ; -3216.83,2482.55 cw(c-3231.82,2467.56) -3210.62,2467.56 ; -3216.83,2482.55 cw(c-3231.82,2467.56) -3210.62,2467.56 ; -3216.83,2482.55 cw(c-3231.82,2467.56) -3210.62,2467.56 ; -3216.83,2482.55 cw(c-3231.82,2467.56) -3210.62,2467.56 ; -3216.83,2482.55 cw(c-3231.82,2467.56) -3210.62,2467.56 ; -3216.83,2482.55 cw(c-3231.82,2467.56) -3210.62,2467.56 ; C13.2@-3213.55,1642.81 cw(c-3196.48,1625.74) -3196.48,1649.88 ; C13.2@-3213.55,1642.81 cw(c-3196.48,1625.74) -3196.48,1649.88 ; C13.2@-3213.55,1642.81 cw(c-3196.48,1625.74) -3196.48,1649.88 ; C13.2@-3213.55,1642.81 cw(c-3196.48,1625.74) -3196.48,1649.88 ; C13.2@-3213.55,1642.81 cw(c-3196.48,1625.74) -3196.48,1649.88 ; C13.2@-3213.55,1642.81 cw(c-3196.48,1625.74) -3196.48,1649.88 ; C13.2@-3213.55,1642.81 cw(c-3196.48,1625.74) -3196.48,1649.88 ; C13.2@-3213.55,1642.81 cw(c-3196.48,1625.74) -3196.48,1649.88 ; C13.2@-3213.55,1642.81 cw(c-3196.48,1625.74) -3196.48,1649.88 ; C13.2@-3213.55,1656.95 ccw(c-3196.48,1674.02) -3196.48,1649.88 ; C13.2@-3213.55,1656.95 ccw(c-3196.48,1674.02) -3196.48,1649.88 ; C13.2@-3213.55,1656.95 ccw(c-3196.48,1674.02) -3196.48,1649.88 ; C13.2@-3213.55,1656.95 ccw(c-3196.48,1674.02) -3196.48,1649.88 ; C13.2@-3213.55,1656.95 ccw(c-3196.48,1674.02) -3196.48,1649.88 ; C13.2@-3213.55,1656.95 ccw(c-3196.48,1674.02) -3196.48,1649.88 ; C13.2@-3213.55,1656.95 ccw(c-3196.48,1674.02) -3196.48,1649.88 ; C13.2@-3213.55,1656.95 ccw(c-3196.48,1674.02) -3196.48,1649.88 ; C13.2@-3213.55,1656.95 ccw(c-3196.48,1674.02) -3196.48,1649.88 ; -3210.62,2459.09 ccw(c-3174.41,2459.09) C1.2@-3200.02,2433.49 ; -3210.62,2459.09 ccw(c-3174.41,2459.09) C1.2@-3200.02,2433.49 ; -3210.62,2459.09 ccw(c-3174.41,2459.09) C1.2@-3200.02,2433.49 ; -3210.62,2459.09 ccw(c-3174.41,2459.09) C1.2@-3200.02,2433.49 ; -3210.62,2459.09 ccw(c-3174.41,2459.09) C1.2@-3200.02,2433.49 ; -3210.62,2459.09 ccw(c-3174.41,2459.09) C1.2@-3200.02,2433.49 ; -3210.62,2459.09 ccw(c-3174.41,2459.09) C1.2@-3200.02,2433.49 ; -3210.62,2459.09 ccw(c-3174.41,2459.09) C1.2@-3200.02,2433.49 ; -3210.62,2459.09 ccw(c-3174.41,2459.09) C1.2@-3200.02,2433.49 ; -3210.62,2467.56 cw(c-3189.43,2467.56) -3204.41,2482.55 ; -3210.62,2467.56 cw(c-3189.43,2467.56) -3204.41,2482.55 ; -3210.62,2467.56 cw(c-3189.43,2467.56) -3204.41,2482.55 ; -3210.62,2467.56 cw(c-3189.43,2467.56) -3204.41,2482.55 ; -3210.62,2467.56 cw(c-3189.43,2467.56) -3204.41,2482.55 ; -3210.62,2467.56 cw(c-3189.43,2467.56) -3204.41,2482.55 ; -3210.62,2467.56 cw(c-3189.43,2467.56) -3204.41,2482.55 ; -3210.62,2467.56 cw(c-3189.43,2467.56) -3204.41,2482.55 ; RP1.2@-3197.26,1853.38 cw(c-3218.98,1826.76) v2(-3184.62,1826.76) ; RP1.2@-3197.26,1853.38 cw(c-3218.98,1826.76) v2(-3184.62,1826.76) ; RP1.2@-3197.26,1853.38 cw(c-3218.98,1826.76) v2(-3184.62,1826.76) ; RP1.2@-3197.26,1853.38 cw(c-3218.98,1826.76) v2(-3184.62,1826.76) ; RP1.2@-3197.26,1853.38 cw(c-3218.98,1826.76) v2(-3184.62,1826.76) ; RP1.2@-3197.26,1853.38 cw(c-3218.98,1826.76) v2(-3184.62,1826.76) ; RP1.2@-3197.26,1853.38 cw(c-3218.98,1826.76) v2(-3184.62,1826.76) ; RP1.2@-3197.26,1853.38 cw(c-3218.98,1826.76) v2(-3184.62,1826.76) ; RP1.2@-3197.26,1853.38 cw(c-3218.98,1826.76) v2(-3184.62,1826.76) ; v2@-3190.83,1832.96 ccw(c-3205.82,1847.95) RP1.2@-3184.62,1847.95 ; v2@-3190.83,1832.96 ccw(c-3205.82,1847.95) RP1.2@-3184.62,1847.95 ; v2@-3190.83,1832.96 ccw(c-3205.82,1847.95) RP1.2@-3184.62,1847.95 ; v2@-3190.83,1832.96 ccw(c-3205.82,1847.95) RP1.2@-3184.62,1847.95 ; v2@-3190.83,1832.96 ccw(c-3205.82,1847.95) RP1.2@-3184.62,1847.95 ; v2@-3190.83,1832.96 ccw(c-3205.82,1847.95) RP1.2@-3184.62,1847.95 ; v2@-3190.83,1832.96 ccw(c-3205.82,1847.95) RP1.2@-3184.62,1847.95 ; v2@-3190.83,1832.96 ccw(c-3205.82,1847.95) RP1.2@-3184.62,1847.95 ; v2@-3190.83,1832.96 ccw(c-3205.82,1847.95) RP1.2@-3184.62,1847.95 ; v2(-3184.62,1826.76) cw(c-3150.26,1826.76) RP1.2@-3171.98,1853.38 ; v2(-3184.62,1826.76) cw(c-3150.26,1826.76) RP1.2@-3171.98,1853.38 ; v2(-3184.62,1826.76) cw(c-3150.26,1826.76) RP1.2@-3171.98,1853.38 ; v2(-3184.62,1826.76) cw(c-3150.26,1826.76) RP1.2@-3171.98,1853.38 ; v2(-3184.62,1826.76) cw(c-3150.26,1826.76) RP1.2@-3171.98,1853.38 ; v2(-3184.62,1826.76) cw(c-3150.26,1826.76) RP1.2@-3171.98,1853.38 ; v2(-3184.62,1826.76) cw(c-3150.26,1826.76) RP1.2@-3171.98,1853.38 ; v2(-3184.62,1826.76) cw(c-3150.26,1826.76) RP1.2@-3171.98,1853.38 ; v2(-3184.62,1826.76) cw(c-3150.26,1826.76) RP1.2@-3171.98,1853.38 ; RP1.2@-3184.62,1847.95 ccw(c-3163.43,1847.95) v2@-3178.41,1832.96 ; RP1.2@-3184.62,1847.95 ccw(c-3163.43,1847.95) v2@-3178.41,1832.96 ; RP1.2@-3184.62,1847.95 ccw(c-3163.43,1847.95) v2@-3178.41,1832.96 ; RP1.2@-3184.62,1847.95 ccw(c-3163.43,1847.95) v2@-3178.41,1832.96 ; RP1.2@-3184.62,1847.95 ccw(c-3163.43,1847.95) v2@-3178.41,1832.96 ; RP1.2@-3184.62,1847.95 ccw(c-3163.43,1847.95) v2@-3178.41,1832.96 ; RP1.2@-3184.62,1847.95 ccw(c-3163.43,1847.95) v2@-3178.41,1832.96 ; RP1.2@-3184.62,1847.95 ccw(c-3163.43,1847.95) v2@-3178.41,1832.96 ; RP1.2@-3184.62,1847.95 ccw(c-3163.43,1847.95) v2@-3178.41,1832.96 ; -3093.52,1629.83 cw(c-3108.51,1614.84) v2@-3087.31,1614.84 ; -3093.52,1629.83 ccw(c-3078.54,1644.82) v2@-3078.54,1623.62 ; -3093.52,1629.83 cw(c-3108.51,1614.84) v2@-3087.31,1614.84 ; -3093.52,1629.83 ccw(c-3078.54,1644.82) v2@-3078.54,1623.62 ; -3093.52,1629.83 cw(c-3108.51,1614.84) v2@-3087.31,1614.84 ; -3093.52,1629.83 ccw(c-3078.54,1644.82) v2@-3078.54,1623.62 ; -3093.52,1629.83 cw(c-3108.51,1614.84) v2@-3087.31,1614.84 ; -3093.52,1629.83 ccw(c-3078.54,1644.82) v2@-3078.54,1623.62 ; -3093.52,1629.83 cw(c-3108.51,1614.84) v2@-3087.31,1614.84 ; -3093.52,1629.83 ccw(c-3078.54,1644.82) v2@-3078.54,1623.62 ; -3093.52,1629.83 ccw(c-3078.54,1644.82) v2@-3078.54,1623.62 ; -3093.52,1629.83 cw(c-3108.51,1614.84) v2@-3087.31,1614.84 ; -3093.52,1629.83 ccw(c-3078.54,1644.82) v2@-3078.54,1623.62 ; -3093.52,1629.83 cw(c-3108.51,1614.84) v2@-3087.31,1614.84 ; -3093.52,1629.83 ccw(c-3078.54,1644.82) v2@-3078.54,1623.62 ; -3093.52,1629.83 cw(c-3108.51,1614.84) v2@-3087.31,1614.84 ; -3093.52,1629.83 ccw(c-3078.54,1644.82) v2@-3078.54,1623.62 ; -3093.52,1629.83 cw(c-3108.51,1614.84) v2@-3087.31,1614.84 ; v2@-3072.33,1608.63 cw(c-3057.34,1593.65) -3057.34,1614.84 ; v2@-3072.33,1608.63 cw(c-3057.34,1593.65) -3057.34,1614.84 ; v2@-3072.33,1608.63 cw(c-3057.34,1593.65) -3057.34,1614.84 ; v2@-3072.33,1608.63 cw(c-3057.34,1593.65) -3057.34,1614.84 ; v2@-3072.33,1608.63 cw(c-3057.34,1593.65) -3057.34,1614.84 ; v2@-3072.33,1608.63 cw(c-3057.34,1593.65) -3057.34,1614.84 ; v2@-3072.33,1608.63 cw(c-3057.34,1593.65) -3057.34,1614.84 ; v2@-3072.33,1608.63 cw(c-3057.34,1593.65) -3057.34,1614.84 ; v2@-3072.33,1608.63 cw(c-3057.34,1593.65) -3057.34,1614.84 ; v2@-3072.33,1621.05 ccw(c-3057.34,1636.04) -3057.34,1614.84 ; v2@-3072.33,1621.05 ccw(c-3057.34,1636.04) -3057.34,1614.84 ; v2@-3072.33,1621.05 ccw(c-3057.34,1636.04) -3057.34,1614.84 ; v2@-3072.33,1621.05 ccw(c-3057.34,1636.04) -3057.34,1614.84 ; v2@-3072.33,1621.05 ccw(c-3057.34,1636.04) -3057.34,1614.84 ; v2@-3072.33,1621.05 ccw(c-3057.34,1636.04) -3057.34,1614.84 ; v2@-3072.33,1621.05 ccw(c-3057.34,1636.04) -3057.34,1614.84 ; v2@-3072.33,1621.05 ccw(c-3057.34,1636.04) -3057.34,1614.84 ; v2@-3072.33,1621.05 ccw(c-3057.34,1636.04) -3057.34,1614.84 ; -3065.75,754.84 cw(c-3065.75,718.63) C28.2@-3040.14,744.24 ; -3065.75,754.84 ccw(c-3065.75,791.06) C28.2@-3040.14,765.45 ; -3065.75,754.84 cw(c-3065.75,718.63) C28.2@-3040.14,744.24 ; -3065.75,754.84 ccw(c-3065.75,791.06) C28.2@-3040.14,765.45 ; -3065.75,754.84 cw(c-3065.75,718.63) C28.2@-3040.14,744.24 ; -3065.75,754.84 ccw(c-3065.75,791.06) C28.2@-3040.14,765.45 ; -3065.75,754.84 cw(c-3065.75,718.63) C28.2@-3040.14,744.24 ; -3065.75,754.84 ccw(c-3065.75,791.06) C28.2@-3040.14,765.45 ; -3065.75,754.84 cw(c-3065.75,718.63) C28.2@-3040.14,744.24 ; -3065.75,754.84 ccw(c-3065.75,791.06) C28.2@-3040.14,765.45 ; -3065.75,754.84 ccw(c-3065.75,791.06) C28.2@-3040.14,765.45 ; -3065.75,754.84 cw(c-3065.75,718.63) C28.2@-3040.14,744.24 ; -3065.75,754.84 ccw(c-3065.75,791.06) C28.2@-3040.14,765.45 ; -3065.75,754.84 cw(c-3065.75,718.63) C28.2@-3040.14,744.24 ; -3065.75,754.84 ccw(c-3065.75,791.06) C28.2@-3040.14,765.45 ; -3065.75,754.84 cw(c-3065.75,718.63) C28.2@-3040.14,744.24 ; -3065.75,754.84 ccw(c-3065.75,791.06) C28.2@-3040.14,765.45 ; -3065.75,754.84 cw(c-3065.75,718.63) C28.2@-3040.14,744.24 ; -3023.68,1614.84 cw(c-3023.68,1590.7) C36.2@-3006.61,1607.77 ; -3023.68,1614.84 ccw(c-3023.68,1638.98) C36.2@-3006.61,1621.91 ; -3023.68,1614.84 cw(c-3023.68,1590.7) C36.2@-3006.61,1607.77 ; -3023.68,1614.84 ccw(c-3023.68,1638.98) C36.2@-3006.61,1621.91 ; -3023.68,1614.84 cw(c-3023.68,1590.7) C36.2@-3006.61,1607.77 ; -3023.68,1614.84 ccw(c-3023.68,1638.98) C36.2@-3006.61,1621.91 ; -3023.68,1614.84 cw(c-3023.68,1590.7) C36.2@-3006.61,1607.77 ; -3023.68,1614.84 ccw(c-3023.68,1638.98) C36.2@-3006.61,1621.91 ; -3023.68,1614.84 cw(c-3023.68,1590.7) C36.2@-3006.61,1607.77 ; -3023.68,1614.84 ccw(c-3023.68,1638.98) C36.2@-3006.61,1621.91 ; -3023.68,1614.84 ccw(c-3023.68,1638.98) C36.2@-3006.61,1621.91 ; -3023.68,1614.84 cw(c-3023.68,1590.7) C36.2@-3006.61,1607.77 ; -3023.68,1614.84 ccw(c-3023.68,1638.98) C36.2@-3006.61,1621.91 ; -3023.68,1614.84 cw(c-3023.68,1590.7) C36.2@-3006.61,1607.77 ; -3023.68,1614.84 ccw(c-3023.68,1638.98) C36.2@-3006.61,1621.91 ; -3023.68,1614.84 cw(c-3023.68,1590.7) C36.2@-3006.61,1607.77 ; -3023.68,1614.84 ccw(c-3023.68,1638.98) C36.2@-3006.61,1621.91 ; -3023.68,1614.84 cw(c-3023.68,1590.7) C36.2@-3006.61,1607.77 ; C36.2@-3006.61,1607.77 cw(c-3023.68,1590.7) -2999.54,1590.7 ; C36.2@-3006.61,1607.77 cw(c-3023.68,1590.7) -2999.54,1590.7 ; C36.2@-3006.61,1607.77 cw(c-3023.68,1590.7) -2999.54,1590.7 ; C36.2@-3006.61,1607.77 cw(c-3023.68,1590.7) -2999.54,1590.7 ; C36.2@-3006.61,1607.77 cw(c-3023.68,1590.7) -2999.54,1590.7 ; C36.2@-3006.61,1607.77 cw(c-3023.68,1590.7) -2999.54,1590.7 ; C36.2@-3006.61,1607.77 cw(c-3023.68,1590.7) -2999.54,1590.7 ; C36.2@-3006.61,1607.77 cw(c-3023.68,1590.7) -2999.54,1590.7 ; C36.2@-3006.61,1607.77 cw(c-3023.68,1590.7) -2999.54,1590.7 ; -2999.54,1590.7 cw(c-2975.39,1590.7) C36.2@-2992.46,1607.77 ; -2999.54,1590.7 cw(c-2975.39,1590.7) C36.2@-2992.46,1607.77 ; -2999.54,1590.7 cw(c-2975.39,1590.7) C36.2@-2992.46,1607.77 ; -2999.54,1590.7 cw(c-2975.39,1590.7) C36.2@-2992.46,1607.77 ; -2999.54,1590.7 cw(c-2975.39,1590.7) C36.2@-2992.46,1607.77 ; -2999.54,1590.7 cw(c-2975.39,1590.7) C36.2@-2992.46,1607.77 ; -2999.54,1590.7 cw(c-2975.39,1590.7) C36.2@-2992.46,1607.77 ; -2999.54,1590.7 cw(c-2975.39,1590.7) C36.2@-2992.46,1607.77 ; -2999.54,1590.7 cw(c-2975.39,1590.7) C36.2@-2992.46,1607.77 ; -2965.24,2367.13 cw(c-2931.43,2333.32) S3.2@-2915.24,2378.31 ; -2965.24,2367.13 cw(c-2931.43,2333.32) S3.2@-2915.24,2378.31 ; -2965.24,2367.13 cw(c-2931.43,2333.32) S3.2@-2915.24,2378.31 ; -2965.24,2367.13 cw(c-2931.43,2333.32) S3.2@-2915.24,2378.31 ; -2965.24,2367.13 cw(c-2931.43,2333.32) S3.2@-2915.24,2378.31 ; -2965.24,2367.13 cw(c-2931.43,2333.32) S3.2@-2915.24,2378.31 ; -2965.24,2367.13 cw(c-2931.43,2333.32) S3.2@-2915.24,2378.31 ; -2965.24,2367.13 cw(c-2931.43,2333.32) S3.2@-2915.24,2378.31 ; -2965.24,2367.13 cw(c-2931.43,2333.32) S3.2@-2915.24,2378.31 ; -2954.1,2378.28 cw(c-2925.53,2349.71) S3.2@-2911.86,2387.72 ; -2954.1,2378.28 cw(c-2925.53,2349.71) S3.2@-2911.86,2387.72 ; -2954.1,2378.28 cw(c-2925.53,2349.71) S3.2@-2911.86,2387.72 ; -2954.1,2378.28 cw(c-2925.53,2349.71) S3.2@-2911.86,2387.72 ; -2954.1,2378.28 cw(c-2925.53,2349.71) S3.2@-2911.86,2387.72 ; -2954.1,2378.28 cw(c-2925.53,2349.71) S3.2@-2911.86,2387.72 ; -2954.1,2378.28 cw(c-2925.53,2349.71) S3.2@-2911.86,2387.72 ; -2954.1,2378.28 cw(c-2925.53,2349.71) S3.2@-2911.86,2387.72 ; -2954.1,2378.28 cw(c-2925.53,2349.71) S3.2@-2911.86,2387.72 ; -2946.53,2385.84 cw(c-2946.53,2379.2) S3.2@-2940.02,2380.47 ; -2946.53,2385.84 ccw(c-2946.53,2392.48) S3.2@-2940.02,2391.21 ; -2946.53,2385.84 cw(c-2946.53,2379.2) S3.2@-2940.02,2380.47 ; -2946.53,2385.84 ccw(c-2946.53,2392.48) S3.2@-2940.02,2391.21 ; -2946.53,2385.84 cw(c-2946.53,2379.2) S3.2@-2940.02,2380.47 ; -2946.53,2385.84 ccw(c-2946.53,2392.48) S3.2@-2940.02,2391.21 ; -2946.53,2385.84 cw(c-2946.53,2379.2) S3.2@-2940.02,2380.47 ; -2946.53,2385.84 ccw(c-2946.53,2392.48) S3.2@-2940.02,2391.21 ; -2946.53,2385.84 cw(c-2946.53,2379.2) S3.2@-2940.02,2380.47 ; -2946.53,2385.84 ccw(c-2946.53,2392.48) S3.2@-2940.02,2391.21 ; -2946.53,2385.84 ccw(c-2946.53,2392.48) S3.2@-2940.02,2391.21 ; -2946.53,2385.84 cw(c-2946.53,2379.2) S3.2@-2940.02,2380.47 ; -2946.53,2385.84 ccw(c-2946.53,2392.48) S3.2@-2940.02,2391.21 ; -2946.53,2385.84 cw(c-2946.53,2379.2) S3.2@-2940.02,2380.47 ; -2946.53,2385.84 ccw(c-2946.53,2392.48) S3.2@-2940.02,2391.21 ; -2946.53,2385.84 cw(c-2946.53,2379.2) S3.2@-2940.02,2380.47 ; -2946.53,2385.84 ccw(c-2946.53,2392.48) S3.2@-2940.02,2391.21 ; -2946.53,2385.84 cw(c-2946.53,2379.2) S3.2@-2940.02,2380.47 ; -2913.68,2179.84 cw(c-2913.68,2155.7) C15.1@-2896.61,2172.77 ; -2913.68,2179.84 ccw(c-2913.68,2203.98) C15.1@-2896.61,2186.91 ; -2913.68,2179.84 cw(c-2913.68,2155.7) C15.1@-2896.61,2172.77 ; -2913.68,2179.84 ccw(c-2913.68,2203.98) C15.1@-2896.61,2186.91 ; -2913.68,2179.84 cw(c-2913.68,2155.7) C15.1@-2896.61,2172.77 ; -2913.68,2179.84 ccw(c-2913.68,2203.98) C15.1@-2896.61,2186.91 ; -2913.68,2179.84 cw(c-2913.68,2155.7) C15.1@-2896.61,2172.77 ; -2913.68,2179.84 ccw(c-2913.68,2203.98) C15.1@-2896.61,2186.91 ; -2913.68,2179.84 cw(c-2913.68,2155.7) C15.1@-2896.61,2172.77 ; -2913.68,2179.84 ccw(c-2913.68,2203.98) C15.1@-2896.61,2186.91 ; -2913.68,2179.84 ccw(c-2913.68,2203.98) C15.1@-2896.61,2186.91 ; -2913.68,2179.84 cw(c-2913.68,2155.7) C15.1@-2896.61,2172.77 ; -2913.68,2179.84 ccw(c-2913.68,2203.98) C15.1@-2896.61,2186.91 ; -2913.68,2179.84 cw(c-2913.68,2155.7) C15.1@-2896.61,2172.77 ; -2913.68,2179.84 ccw(c-2913.68,2203.98) C15.1@-2896.61,2186.91 ; -2913.68,2179.84 cw(c-2913.68,2155.7) C15.1@-2896.61,2172.77 ; -2913.68,2179.84 ccw(c-2913.68,2203.98) C15.1@-2896.61,2186.91 ; -2913.68,2179.84 cw(c-2913.68,2155.7) C15.1@-2896.61,2172.77 ; S3.2@-2911.33,2405.64 ccw(c-2959.13,2453.44) v1@-2891.54,2453.44 ; S3.2@-2911.33,2405.64 ccw(c-2959.13,2453.44) v1@-2891.54,2453.44 ; S3.2@-2911.33,2405.64 ccw(c-2959.13,2453.44) v1@-2891.54,2453.44 ; S3.2@-2911.33,2405.64 ccw(c-2959.13,2453.44) v1@-2891.54,2453.44 ; S3.2@-2911.33,2405.64 ccw(c-2959.13,2453.44) v1@-2891.54,2453.44 ; S3.2@-2911.33,2405.64 ccw(c-2959.13,2453.44) v1@-2891.54,2453.44 ; S3.2@-2911.33,2405.64 ccw(c-2959.13,2453.44) v1@-2891.54,2453.44 ; S3.2@-2911.33,2405.64 ccw(c-2959.13,2453.44) v1@-2891.54,2453.44 ; S3.2@-2911.33,2405.64 ccw(c-2959.13,2453.44) v1@-2891.54,2453.44 ; S3.2@-2904.26,2398.57 ccw(c-2934.99,2429.3) -2891.54,2429.3 ; S3.2@-2904.26,2398.57 ccw(c-2934.99,2429.3) -2891.54,2429.3 ; S3.2@-2904.26,2398.57 ccw(c-2934.99,2429.3) -2891.54,2429.3 ; S3.2@-2904.26,2398.57 ccw(c-2934.99,2429.3) -2891.54,2429.3 ; S3.2@-2904.26,2398.57 ccw(c-2934.99,2429.3) -2891.54,2429.3 ; S3.2@-2904.26,2398.57 ccw(c-2934.99,2429.3) -2891.54,2429.3 ; S3.2@-2904.26,2398.57 ccw(c-2934.99,2429.3) -2891.54,2429.3 ; S3.2@-2904.26,2398.57 ccw(c-2934.99,2429.3) -2891.54,2429.3 ; S3.2@-2904.26,2398.57 ccw(c-2934.99,2429.3) -2891.54,2429.3 ; v1@-2897.74,2452.63 cw(c-2912.73,2437.65) -2891.54,2437.65 ; v1@-2897.74,2452.63 cw(c-2912.73,2437.65) -2891.54,2437.65 ; v1@-2897.74,2452.63 cw(c-2912.73,2437.65) -2891.54,2437.65 ; v1@-2897.74,2452.63 cw(c-2912.73,2437.65) -2891.54,2437.65 ; v1@-2897.74,2452.63 cw(c-2912.73,2437.65) -2891.54,2437.65 ; v1@-2897.74,2452.63 cw(c-2912.73,2437.65) -2891.54,2437.65 ; v1@-2897.74,2452.63 cw(c-2912.73,2437.65) -2891.54,2437.65 ; v1@-2897.74,2452.63 cw(c-2912.73,2437.65) -2891.54,2437.65 ; -2891.54,2429.3 ccw(c-2848.08,2429.3) S3.2@-2878.81,2398.57 ; -2891.54,2429.3 ccw(c-2848.08,2429.3) S3.2@-2878.81,2398.57 ; -2891.54,2429.3 ccw(c-2848.08,2429.3) S3.2@-2878.81,2398.57 ; -2891.54,2429.3 ccw(c-2848.08,2429.3) S3.2@-2878.81,2398.57 ; -2891.54,2429.3 ccw(c-2848.08,2429.3) S3.2@-2878.81,2398.57 ; -2891.54,2429.3 ccw(c-2848.08,2429.3) S3.2@-2878.81,2398.57 ; -2891.54,2429.3 ccw(c-2848.08,2429.3) S3.2@-2878.81,2398.57 ; -2891.54,2429.3 ccw(c-2848.08,2429.3) S3.2@-2878.81,2398.57 ; -2891.54,2429.3 ccw(c-2848.08,2429.3) S3.2@-2878.81,2398.57 ; -2891.54,2437.65 cw(c-2870.34,2437.65) -2885.33,2452.63 ; -2891.54,2437.65 cw(c-2870.34,2437.65) -2885.33,2452.63 ; -2891.54,2437.65 cw(c-2870.34,2437.65) -2885.33,2452.63 ; -2891.54,2437.65 cw(c-2870.34,2437.65) -2885.33,2452.63 ; -2891.54,2437.65 cw(c-2870.34,2437.65) -2885.33,2452.63 ; -2891.54,2437.65 cw(c-2870.34,2437.65) -2885.33,2452.63 ; -2891.54,2437.65 cw(c-2870.34,2437.65) -2885.33,2452.63 ; -2891.54,2437.65 cw(c-2870.34,2437.65) -2885.33,2452.63 ; v1@-2891.54,2453.44 ccw(c-2823.94,2453.44) S3.2@-2871.74,2405.64 ; v1@-2891.54,2453.44 ccw(c-2823.94,2453.44) S3.2@-2871.74,2405.64 ; v1@-2891.54,2453.44 ccw(c-2823.94,2453.44) S3.2@-2871.74,2405.64 ; v1@-2891.54,2453.44 ccw(c-2823.94,2453.44) S3.2@-2871.74,2405.64 ; v1@-2891.54,2453.44 ccw(c-2823.94,2453.44) S3.2@-2871.74,2405.64 ; v1@-2891.54,2453.44 ccw(c-2823.94,2453.44) S3.2@-2871.74,2405.64 ; v1@-2891.54,2453.44 ccw(c-2823.94,2453.44) S3.2@-2871.74,2405.64 ; v1@-2891.54,2453.44 ccw(c-2823.94,2453.44) S3.2@-2871.74,2405.64 ; v1@-2891.54,2453.44 ccw(c-2823.94,2453.44) S3.2@-2871.74,2405.64 ; v2@-2888.54,1833.62 ccw(c-2888.54,1854.82) -2873.55,1839.83 ; v2@-2888.54,1833.62 ccw(c-2888.54,1854.82) -2873.55,1839.83 ; v2@-2888.54,1833.62 ccw(c-2888.54,1854.82) -2873.55,1839.83 ; v2@-2888.54,1833.62 ccw(c-2888.54,1854.82) -2873.55,1839.83 ; v2@-2888.54,1833.62 ccw(c-2888.54,1854.82) -2873.55,1839.83 ; v2@-2888.54,1833.62 ccw(c-2888.54,1854.82) -2873.55,1839.83 ; v2@-2883.61,1829.77 ccw(c-2900.68,1846.84) U4.7@-2876.54,1846.84 ; v2@-2883.61,1829.77 ccw(c-2900.68,1846.84) U4.7@-2876.54,1846.84 ; v2@-2883.61,1829.77 ccw(c-2900.68,1846.84) U4.7@-2876.54,1846.84 ; v2@-2883.61,1829.77 ccw(c-2900.68,1846.84) U4.7@-2876.54,1846.84 ; v2@-2879.76,1824.84 cw(c-2858.56,1824.84) -2873.55,1839.83 ; v2@-2879.76,1824.84 cw(c-2858.56,1824.84) -2873.55,1839.83 ; v2@-2879.76,1824.84 cw(c-2858.56,1824.84) -2873.55,1839.83 ; v2@-2879.76,1824.84 cw(c-2858.56,1824.84) -2873.55,1839.83 ; v2@-2879.76,1824.84 cw(c-2858.56,1824.84) -2873.55,1839.83 ; v2@-2879.76,1824.84 cw(c-2858.56,1824.84) -2873.55,1839.83 ; -2832.63,1924.84 ccw(c-2832.63,1969.94) U4.0@-2800.74,1938.05 ; -2832.63,1924.84 ccw(c-2832.63,1969.94) U4.0@-2800.74,1938.05 ; -2832.63,1924.84 ccw(c-2832.63,1969.94) U4.0@-2800.74,1938.05 ; -2832.63,1924.84 ccw(c-2832.63,1969.94) U4.0@-2800.74,1938.05 ; U4.0@-2808.49,1924.84 ccw(c-2808.49,1945.8) U4.0@-2793.67,1930.98 ; U4.0@-2808.49,1924.84 ccw(c-2808.49,1945.8) U4.0@-2793.67,1930.98 ; U4.0@-2808.49,1924.84 ccw(c-2808.49,1945.8) U4.0@-2793.67,1930.98 ; U4.0@-2808.49,1924.84 ccw(c-2808.49,1945.8) U4.0@-2793.67,1930.98 ; R10.2@-2709.61,953.91 ccw(c-2726.68,970.98) -2702.54,970.98 ; R10.2@-2709.61,953.91 ccw(c-2726.68,970.98) -2702.54,970.98 ; R10.2@-2709.61,953.91 ccw(c-2726.68,970.98) -2702.54,970.98 ; R10.2@-2709.61,953.91 ccw(c-2726.68,970.98) -2702.54,970.98 ; R10.2@-2709.61,953.91 ccw(c-2726.68,970.98) -2702.54,970.98 ; R10.2@-2709.61,953.91 ccw(c-2726.68,970.98) -2702.54,970.98 ; R10.2@-2709.61,953.91 ccw(c-2726.68,970.98) -2702.54,970.98 ; R10.2@-2709.61,953.91 ccw(c-2726.68,970.98) -2702.54,970.98 ; R10.2@-2709.61,953.91 ccw(c-2726.68,970.98) -2702.54,970.98 ; -2702.54,970.98 ccw(c-2678.39,970.98) R10.2@-2695.46,953.91 ; -2702.54,970.98 ccw(c-2678.39,970.98) R10.2@-2695.46,953.91 ; -2702.54,970.98 ccw(c-2678.39,970.98) R10.2@-2695.46,953.91 ; -2702.54,970.98 ccw(c-2678.39,970.98) R10.2@-2695.46,953.91